# Altium PCB Prometheus_MOSFET_V1.1.PcbDoc
Units mil, origin at the board's own origin, x right, y up, seen from the top; angles counter-clockwise.
Board outline 3345 x 2200 mil, 2 copper layers (Top Layer, Bottom Layer); 46 components, 33 nets, 164 pads, 0 vias.
Unrouted connection lines stored in the file: 12.
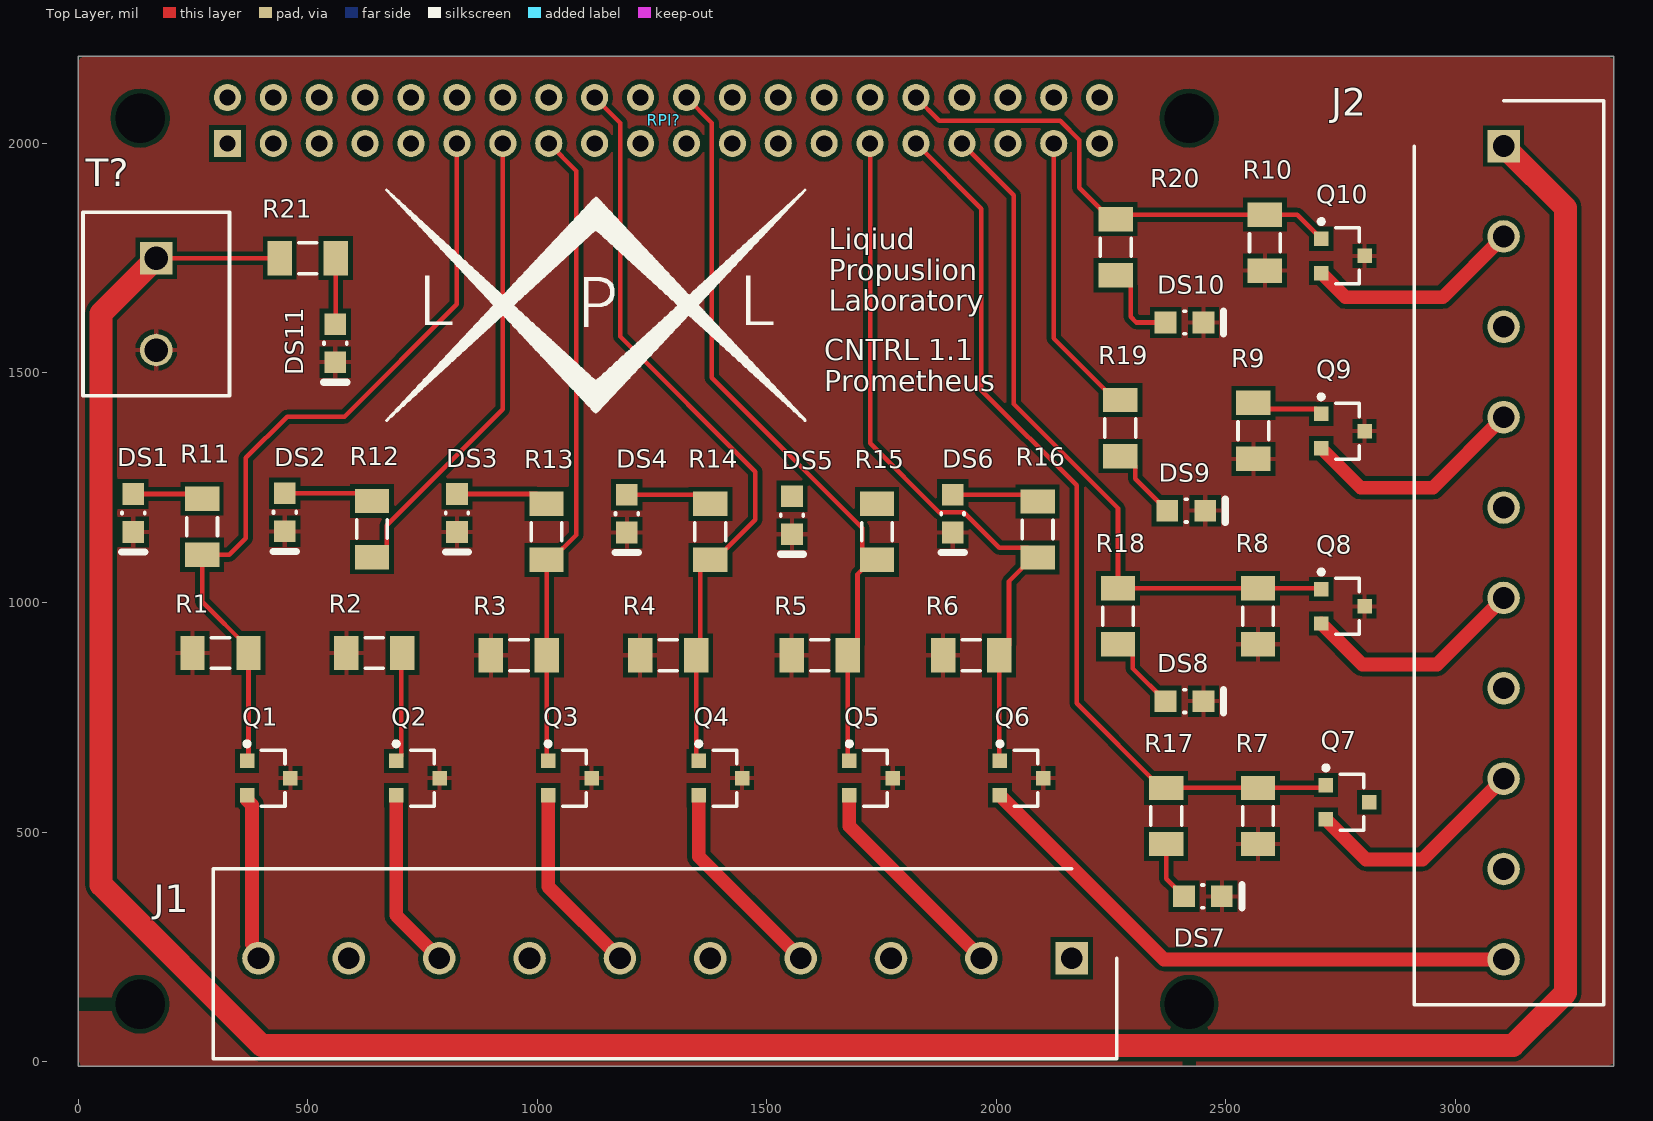
[diagram p0: Top Layer view]
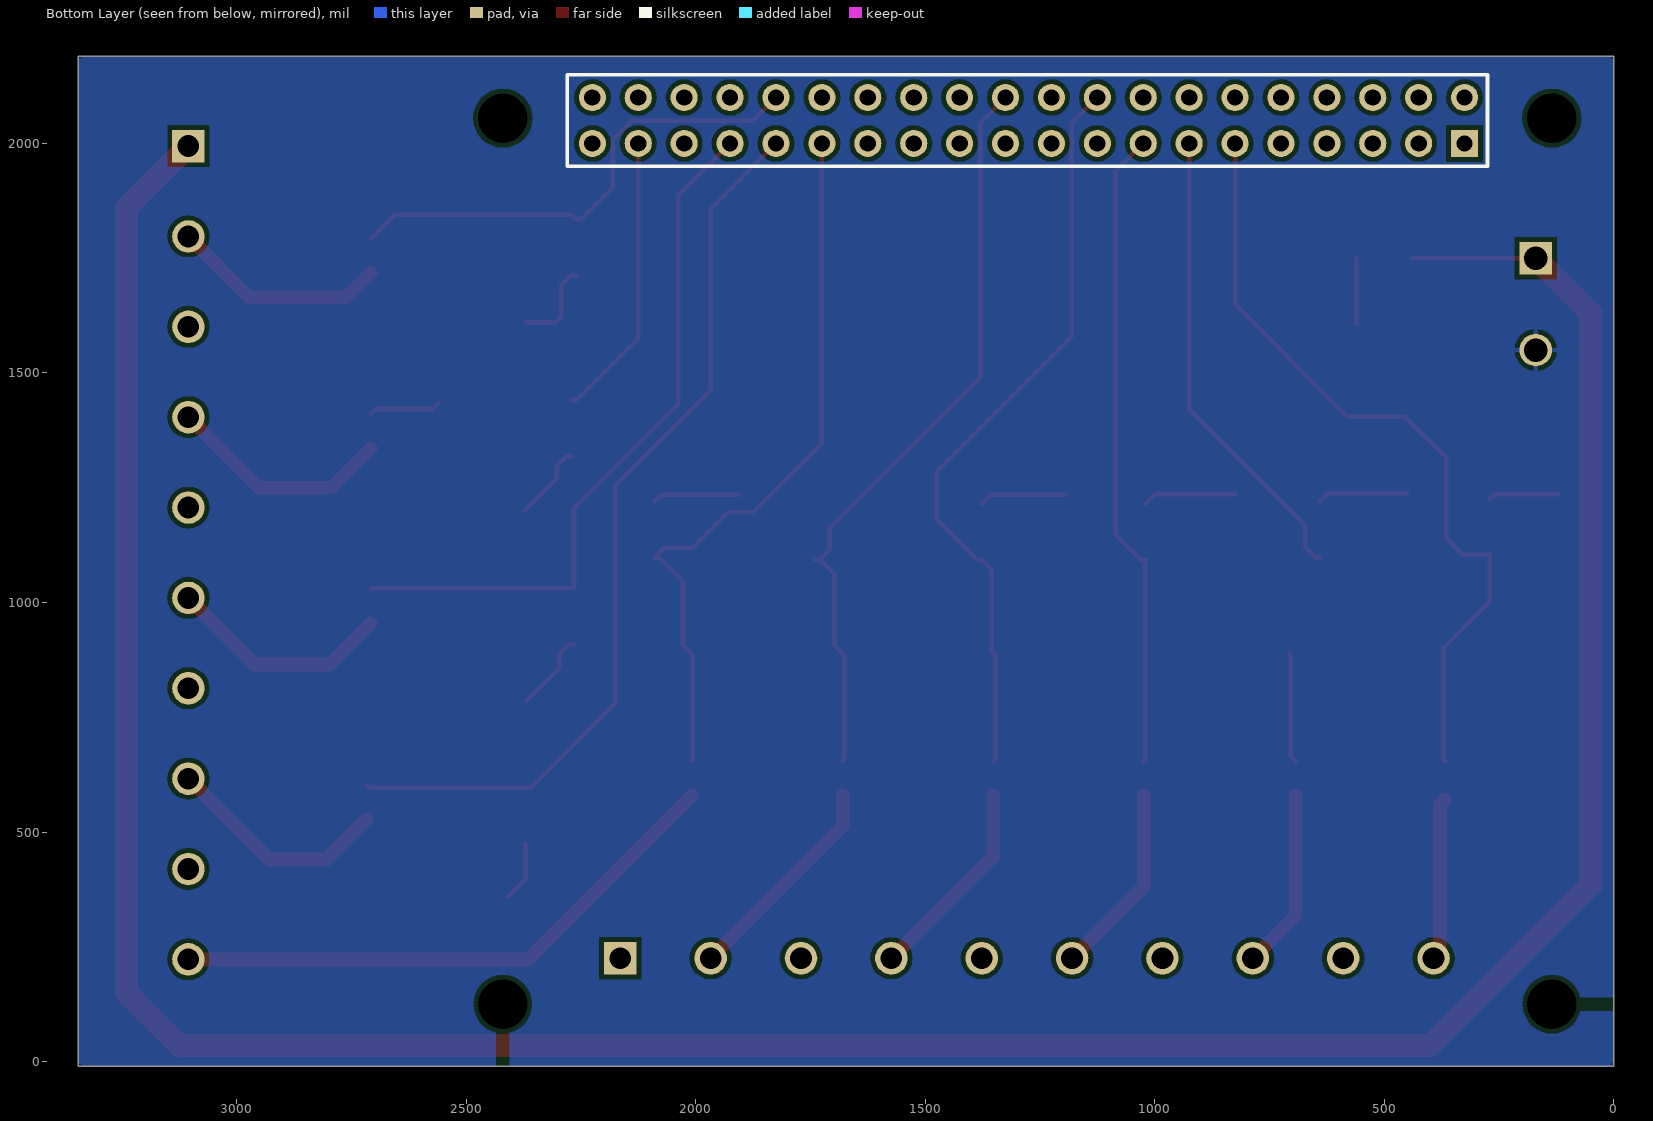
[diagram p1: Bottom Layer view, seen from below]

## Layer stack, top to bottom
Top Solder: solder mask 0.4, Solder Resist, Dk 3.5
Top Layer: signal copper 1.4
Dielectric 1: dielectric 12.6, FR-4, Dk 4.8
Bottom Layer: signal copper 1.4
Bottom Solder: solder mask 0.4, Solder Resist, Dk 3.5

## Board outline
0,-10 3345,-10 3345,2190 0,2190

## Design rules (kind name [scope] priority, off if disabled: settings)
Clearance [All] p1: gap=10 ignorepadtopadclearanceinfootprint=FALSE except(0: Arc-Hole Track-Hole SMDPad-Hole THPad-Hole Via-Hole Fill-Hole Poly-Hole Region-Hole Text-Hole)
PolygonConnect [All] p1: connectstyle=Relief reliefconductorwidth=10 reliefentries=4 polygonreliefangle="90 Angle" airgapwidth=10
RoomDefinition Prometheus_MOSFET_V1.1 [InComponentClass('Prometheus_MOSFET_V1.1')] p1: confinementstyle=ConfineIn formatcopy=TRUE lockcomponents=FALSE outline -1280,-1040 4245,-1040 4245,3090 -1280,3090
RoutingVias [All] p1: holewidth=28 width=50 viastyle="Through Hole" minholewidth=28 minwidth=50 maxholewidth=28 maxwidth=50
SolderMaskExpansion [All] p1: expansion=4
Width [All] p1: maxlimit=10 minlimit=10 preferedwidth=10
30 further rules are at their usual default settings.

## Components (designator, comment, footprint, x,y, rotation, side; value= is the part's Value field where it differs from the comment)
DS1 "LTST-C170KRKT" LTST-C170KRKT_V 120,1195 r270 top
DS2 "LTST-C170KRKT" LTST-C170KRKT_V 450,1196.34 r270 top
DS3 "LTST-C170KRKT" LTST-C170KRKT_V 825,1195 r270 top
DS4 "LTST-C170KRKT" LTST-C170KRKT_V 1195,1193.66 r270 top
DS5 "LTST-C170KRKT" LTST-C170KRKT_V 1555,1190 r270 top
DS6 "LTST-C170KRKT" LTST-C170KRKT_V 1905,1193.66 r270 top
DS7 "LTST-C170KRKT" LTST-C170KRKT_V 2450,360 r0 top
DS8 "LTST-C170KRKT" LTST-C170KRKT_V 2410,785 r0 top
DS9 "LTST-C170KRKT" LTST-C170KRKT_V 2413.66,1200 r0 top
DS10 "LTST-C170KRKT" LTST-C170KRKT_V 2410,1610 r0 top
DS11 "LTST-C170KRKT" LTST-C170KRKT_V 560,1565 r270 top
J1 "1792944" SHDR10W100P0X500_1X10_5000X1050X1360P 2164.25,225 r180 top
J2 "1792944" SHDR10W100P0X500_1X10_5000X1050X1360P 3105,1994.25 r270 top
Q1 "AO3401A" AO-SOT-23-3L_V 415,617.4 r0 top
Q2 "AO3401A" AO-SOT-23-3L_V 740,617.4 r0 top
Q3 "AO3401A" AO-SOT-23-3L_V 1071,617.4 r0 top
Q4 "AO3401A" AO-SOT-23-3L_V 1399,617.4 r0 top
Q5 "AO3401A" AO-SOT-23-3L_V 1727,617.4 r0 top
Q6 "AO3401A" AO-SOT-23-3L_V 2055,617.4 r0 top
Q7 "AO3401A" AO-SOT-23-3L_V 2765,565 r0 top
Q8 "AO3401A" AO-SOT-23-3L_V 2755,991.67 r0 top
Q9 "AO3401A" AO-SOT-23-3L_V 2755,1373.33 r0 top
Q10 "AO3401A" AO-SOT-23-3L_V 2755,1755 r0 top
R1 "1K" RESC1206(3216)_M 310,890 r0 top value="1430.00 Ohm"
R2 "1K" RESC1206(3216)_M 645,890 r0 top value="1430.00 Ohm"
R3 "1K" RESC1206(3216)_M 960,885 r0 top value="1430.00 Ohm"
R4 "1K" RESC1206(3216)_M 1285,885 r0 top value="1430.00 Ohm"
R5 "1K" RESC1206(3216)_M 1615,885 r0 top value="1430.00 Ohm"
R6 "1K" RESC1206(3216)_M 1945,885 r0 top value="1430.00 Ohm"
R7 "1K" RESC1206(3216)_M 2570,535 r90 top value="1430.00 Ohm"
R8 "1K" RESC1206(3216)_M 2570,970 r90 top value="1430.00 Ohm"
R9 "1K" RESC1206(3216)_M 2560,1373.98 r90 top value="1430.00 Ohm"
R10 "1K" RESC1206(3216)_M 2585,1783.98 r90 top value="1430.00 Ohm"
R11 "65" RESC1206(3216)_M 270,1165 r270 top value="1430.00 Ohm"
R12 "65" RESC1206(3216)_M 640,1160 r270 top value="1430.00 Ohm"
R13 "65" RESC1206(3216)_M 1020,1153.98 r270 top value="1430.00 Ohm"
R14 "65" RESC1206(3216)_M 1376.85,1153.98 r270 top value="1430.00 Ohm"
R15 "65" RESC1206(3216)_M 1740,1153.98 r270 top value="1430.00 Ohm"
R16 "65" RESC1206(3216)_M 2090,1158.98 r270 top value="1430.00 Ohm"
R17 "65" RESC1206(3216)_M 2370,535 r90 top value="1430.00 Ohm"
R18 "65" RESC1206(3216)_M 2265,970 r90 top value="1430.00 Ohm"
R19 "65" RESC1206(3216)_M 2270,1380 r90 top value="1430.00 Ohm"
R20 "65" RESC1206(3216)_M 2260,1773.98 r90 top value="1430.00 Ohm"
R21 "500" RESC1206(3216)_M 500,1750 r0 top value="1430.00 Ohm"
RPI? "RPI GPIO Connector" RPI 1275,2050 r180 top
T? "1729128" PHOE-1729128-2_V 170,1650 r270 top

## Footprints (in the part's own frame and the unit in brackets; to place one, negate y for a bottom-side part, rotate by r counter-clockwise, add the part's x,y. Pads: shape width x height; smd on the part's side, far side on the other; paste and mask are expansions set on the pad)
AO-SOT-23-3L_V [mm] "SOT23, 3-Leads, Body 3.1x1.8mm, Pitch 0.95mm"
  rect 0.8x0.8 smd: 1(-1.2,0.95) 2(-1.2,-0.95) 3(1.2,0)
  silkscreen extent -1.32,-1.55 0.9,2.02, body extent -1.5,-1.55 1.5,1.55, height 1.25
LTST-C170KRKT_V [mm] "SMD, 2-Leads, Body 2x1.25mm"
  rect 1.2x1.2 smd: 1(-1.05,0) 2(1.05,0)
  silkscreen extent -0.05,-0.63 2.16,0.64, body extent -1,-0.63 1,0.63, height 1.2
PHOE-1729128-2_V [mm] "Receptacle, 2-Leads, Body 8.1x10.16mm, Pitch 5.08mm"
  rect 1.8x1.8 hole 1.3: 1(-2.54,0)
  round 1.8 hole 1.3: 2(2.54,0)
  silkscreen extent -5.08,-4.05 5.08,4.05, body extent -5.65,-4.05 5.08,4.05, height 10.01
RESC1206(3216)_M [mm] "Chip Resistor, Body 3.2x1.6mm, IPC Low Density"
  rect 1.35x1.9 smd: 1(-1.55,0) 2(1.55,0)
  silkscreen extent -0.5,-0.85 0.5,0.85, body extent -1.67,-0.87 1.67,0.87, height 0.75
RPI [mm]
  rect 1.5x1.5 hole 0.9: 1(24.13,1.27)
  round 1.5 hole 0.9: 2(24.13,-1.27) 3(21.59,1.27) 4(21.59,-1.27) 5(19.05,1.27) 6(19.05,-1.27) 7(16.51,1.27) 8(16.51,-1.27) 9(13.97,1.27) 10(13.97,-1.27) 11(11.43,1.27) 12(11.43,-1.27) 13(8.89,1.27) 14(8.89,-1.27) 15(6.35,1.27) 16(6.35,-1.27) 17(3.81,1.27) 18(3.81,-1.27) 19(1.27,1.27) 20(1.27,-1.27) 21(-1.27,1.27) 22(-1.27,-1.27) 23(-3.81,1.27) 24(-3.81,-1.27) 25(-6.35,1.27) 26(-6.35,-1.27) 27(-8.89,1.27) 28(-8.89,-1.27) 29(-11.43,1.27) 30(-11.43,-1.27) 31(-13.97,1.27) 32(-13.97,-1.27) 33(-16.51,1.27) 34(-16.51,-1.27) 35(-19.05,1.27) 36(-19.05,-1.27) 37(-21.59,1.27) 38(-21.59,-1.27) 39(-24.13,1.27) 40(-24.13,-1.27)
  body extent -25.52,-2.63 25.53,2.38, height 8.5
SHDR10W100P0X500_1X10_5000X1050X1360P [mm]
  rect 1.8x1.8 hole 1.2: 1(0,0)
  round 1.8 hole 1.2: 2(5,0) 3(10,0) 4(15,0) 5(20,0) 6(25,0) 7(30,0) 8(35,0) 9(40,0) 10(45,0)
  silkscreen extent -2.5,-4.95 47.5,5.55, body extent -2.52,-5.52 47.48,4.98, height 13.69

## Part data
DS1 DS2 DS3 DS4 DS5 DS6 DS7 DS8 DS9 DS10 DS11: library part CMP-2000-07593-1, "LED Red, 75 mW, 54 mcd, -55 to 85 degC, 2-Pin SMD, RoHS, Tape and Reel", Case\/Package=0805, Case Code (Metric)=2012, Colour=Red, Forward Current=30mA, Forward Voltage=2V, Lens Colour=Colorless, Manufacturer=Lite-On, Max Operating Temperature=85degC, Min Operating Temperature=-55degC, Package Description="2-Pin Surface Mount Device, Body 2 x 1.25 mm", Package Quantity=1, Package Reference=C170KRKT, Power Dissipation=75mW, Test Current=20mA, Case Code (Imperial)=0805, Datasheet URL=http://optoelectronics.liteon.com/upload/download/DS-22-99-0150/LTST-C170KRKT.pdf, Datasheet Version="Rev. D, 11/2014", Depth=1.6mm, Dominant Wavelength=631nm, Height=1.1mm, Illumination Colour=Red, Lead Free=LeadFree, Length=3.2mm, Lens Style=Rectangular, Lens Transparency=Clear, Luminous Intensity=54mcd, Manufacturer URL=http://www.us.liteon.com/, Mount=SurfaceMount, Mounting Technology=SurfaceMount, Number of Elements=1, Number of LEDs=1, Number of Pins=2, Packaging=TapeandReel, Power Rating=75mW, Radiation Hardening=No, RoHSCompliant=True, Viewing Angle=130degrees, Wavelength=639nm, Width=1.25mm
J1 J2: "Connector", MANUFACTURER_NAME="Phoenix Contact", Mouser Part Number=651-1792944, RS Part Number=8019986, Datasheet Link=https://www.phoenixcontact.com/online/portal/gb/?uri=pxc-oc-itemdetail:pid=1792944&library=gben&pcck=P-11-01-05&tab=1&selectedCategory=ALL, Height=13.6mm, MANUFACTURER_PART_NUMBER=1792944, Mouser Price/Stock=https://www.mouser.com/Search/Refine.aspx?Keyword=651-1792944, RS Price/Stock=http://uk.rs-online.com/web/p/products/8019986
Q1 Q2 Q3 Q4 Q5 Q6 Q7 Q8 Q9 Q10: library part CMP-2000-05778-1, "P-Channel MOSFET, 30 V, 4 A, -55 to 150 degC, 3-Pin SOT-23-3L, RoHS, Tape and Reel", Continuous Drain Current=4A, Drain-Source On-Volt=30V, Frequency (Max)=NotRequiredMHz, Gate-Source Voltage (Max)=?12V, Manufacturer="Alpha and Omega", Operating Temperature Classification=Military, Operating Temp Range=-55Cto150C, Output Power (Max)=NotRequiredW, Package Description="3-Pin Small Outline Transistor, Body 2.95 x 1.6 mm, Pitch 0.95 mm", Package Reference=SOT-23-3L, Package Type=SOT-23, Power Dissipation=1.4W, Power Gain=NotRequireddB, Channel Mode=Enhancement, Datasheet URL=http://www.aosmd.com/res/data_sheets/AO3401A.pdf, Datasheet Version="Rev. 3, 03/2011", Drain-Source On-Res=0.044ohm, Drain Current (Max)=4A, Drain Efficiency=NotRequired%, Manufacturer URL=http://www.aosmd.com/, Mounting=SurfaceMount, Mounting Technology=SurfaceMount, Noise Figure=NotRequireddB, Number of  Elements=1, Package URL=http://www.aosmd.com/res/packaging_information/SOT-23-3L.pdf, Pin Count=3, Polarity=P, Rad Hardened=No, Type=PowerMOSFET
R1 R2 R3 R4 R5 R6 R7 R8 R9 R10 R11 R12 R13 R14 R15 R16 R17 R18 R19 R20 R21: library part CMP-1014-00526-1, "1K43 0.25W 1% 1206 (3216 Metric)  SMD", Case-EIA=1206, Case-Metric=3216, Power="0.25 W", Tolerance="1 %", Technology=SMT
RPI?: library part "rpi connector", "GPIO Header for Raspberry Pi A+/B+/Pi 2/Pi 3 - 2x20", Manufacturer="SparkFun Electronics", Manufacturer Part Number=PRT-14017, Supplier Part Number 1=1568-1462-ND, Accessory Type=Connector, Category="Development Boards, Kits, Programmers", ComponentLink1Description=https://cdn.sparkfun.com/datasheets/Dev/RaspberryPi/12313.pdf, ComponentLink1URL=https://cdn.sparkfun.com/datasheets/Dev/RaspberryPi/12313.pdf, For Use With/Related Products="Raspberry Pi", Nils Minor=author, nilsminor@web.de=mail, Part Status=Active, Pricing 1="1=1.84 (EUR)", RoHS="RoHS Compliant", Stock 1=150, Supplier 1=Digi-Key
T?: library part CMP-2000-05815-1, "PCB Terminal Block, 13.5 A, 400 V, 2-Pin THD, RoHS, Bulk", Current Rating=13500mA, Manufacturer="Phoenix Contact", Package Description="2-Pin Through Hole Device, Body 8.1 x 10.16 mm, Pitch 5.08 mm", Package Reference=1729128-2, Package Version=03/2015, Voltage Rating=400V, Datasheet URL=https://datasheet.ciiva.com/16046/1729128-16046181.pdf, Datasheet Version=12/2013, Manufacturer URL=http://www.phoenixcontact.com/, Mounting Technology=ThroughHole, No. of Positions=2, No. of Rows=1, Orientation=Horizontal, Package URL=https://www.phoenixcontact.com/online/portal/pi/pxc/product_detail_page/!ut/p/b1/3VdJjqNKFDxLH8AFycySyWY2ozFsEPOMMQaDOX1XedGL_1Vdm5YXJleknhSKeBkvI6EA8ncAo3AYoDhBQGco6KN7VURTdemj9us_IEKEZo_YHiPAEWEFmDGOHMORkqKYCORBZxgL7ZoaZYcbFFUZ3fqxSY6GOuxydWUuHqz1ynmMFygu583Bob0Ewr6Sd_l-5m-kAueHiB0jpRwZwe58wwtkpxtMYd_LmGcDRU02dRNEyWt6Y2ti5pSyJ_reIkzIulrqApdnbT11V5jnCKbYNCvhEM1MCpPByat_X379-iThf08CI5GfOPqfBeS3BRoBOdD55AKVv0iLwCMq-2BrzXWSGRH7pUGD9uwXQjiph3xL0DKQwdGa0JImiIOmBNOestqgwTHSSs2oOep-78apyXQBvNi8ZLaFjvjWvcaUEBu0MC6Wbe-d6mB0FAebo2lUWinqYaZs5DAYzV0RP9yitUjnGJ0iI9xhZkT42OCQNUJJhkgWINNQLP2JFP6OpMg3JCVg70jqHT0lvKOnhHf0lPuOnnLf0VPuWx6_dxwUIvwk5WMkT0kLL1mh61l2yZVSzG3pYV_bqo-mj6uMKwKwdnnW8Jh5RTOJzMOA5c-eJDaZQw4mTMPH02PvS_ZAqNVjVTo2WyYLkwH_KU1mmmG5kjRhDqPXLwwVHvVOjCM60-fpXvTDfMGW1PVFVS1r4e4yVDk4ZdNbkUHvqPqQSeian4UD39fNKmachqdJ1NJbyk8rXT9mXTvPk3oE5meulKGgiruPJek-4I9hTT6G8ZLOyRSm2RRVbThERQad5OS28hdt4YW4vG0stgYYzsWsK4_7y6DZMjJSCqri1kyiZR5vD7pwIrNR7QwPHTcLTI5qT7eRlpHrdGiupYlqQDJ7zy_CND8fWWBoLRXxk1RVcXiBQwbTD4Xi7KL-FuO94t9xaqweXzH, Packing=Bulk, PartNumber=1729128, Pitch=5.08mm, RoHS=TRUE

## Free pads (board coordinates)
  round 60 hole 108: 2(-5610,6885) 2(135,2055) 3(-5610,4955) 3(135,125) 4(-3325,4955) 4(2420,125) 5(-3325,6885) 5(2420,2055)

## Nets (pads, with @x,y where several pads share a name; then routed paths per layer and width w, separated by ;. In a path a pad name is that pad's centre, name@x,y a point inside that pad or via, vN(x,y) a via of type N, cw(c..) or ccw(c..) an arc to the next point about the centre after c; other vN are vias at no path point)
+24: J1.1 J1.3 J1.5 J1.7 J1.9 J2.1 J2.3 J2.5 J2.7 J2.9 R21.1 T?.1 | length 6966.5
  Top Layer w10: T?.1 R21.1
  Top Layer w50: T?.1 50,1630 50,385 400,35 3125,35 3240,150 3240,1859.25 J2.1
GND: DS1.2 DS2.2 DS3.2 DS4.2 DS5.2 DS6.2 DS7.2 DS8.2 DS9.2 DS10.2 DS11.2 Q1.3 Q2.3 Q3.3 Q4.3 Q5.3 Q6.3 Q8.3 Q9.3 Q10.3 R1.1 R2.1 R3.1 R4.1 R5.1 R6.1 R7.1 R8.1 R9.1 R10.1 T?.2
NetDS1_1: DS1.1 R11.1 | length 154.3
  Top Layer w10: DS1.1 259.68,1236.34 R11.1
NetDS2_1: DS2.1 R12.1 | length 196.9
  Top Layer w10: DS2.1 623.35,1237.68 R12.1
NetDS3_1: DS3.1 R13.1 | length 203.8
  Top Layer w10: DS3.1 998.66,1236.34 R13.1
NetDS4_1: DS4.1 R14.1 | length 190.1
  Top Layer w10: DS4.1 1356.85,1235 R14.1
NetDS5_1: DS5.1 R15.1
NetDS6_1: DS6.1 R16.1 | length 191.2
  Top Layer w10: DS6.1 2075,1235 R16.1
NetDS7_1: DS7.1 R17.1 | length 130
  Top Layer w10: R17.1 2370,398.66 DS7.1
NetDS8_1: DS8.1 R18.1 | length 173.3
  Top Layer w10: R18.1 2275.83,908.98 2297.4,887.4 2297.4,856.26 DS8.1
NetDS9_1: DS9.1 R19.1 | length 167.7
  Top Layer w10: R19.1 2280.83,1318.98 2302.4,1297.4 2302.4,1269.92 DS9.1
NetDS10_1: DS10.1 R20.1 | length 191.6
  Top Layer w10: R20.1 2270.83,1712.95 2292.4,1691.38 2292.4,1622.6 2305,1610 DS10.1
NetDS11_1: DS11.1 R21.2 | length 144.1
  Top Layer w10: DS11.1 561.02,1607.36 R21.2
SIG1: Q1.1 R1.2 R11.2 RPI?.11 | length 1726.1
  Top Layer w10: Q1.1 371.02,658.07 R1.2 371.02,900.83 270,1001.85 R11.2 328.98,1103.98 365,1140 365,1315 455,1405 580,1405 825,1650 RPI?.11
SIG2: Q2.1 R2.2 R12.2 RPI?.13 | length 1266.1
  Top Layer w10: R12.2 650.83,1098.98 672.4,1120.55 672.4,1168.24 925,1420.83 RPI?.13 ; Q2.1 703.5,665.55 703.5,887.48 R2.2
SIG3: Q3.1 R3.2 R13.2 RPI?.15 | length 1404.9
  Top Layer w10: Q3.1 1021.02,657.54 R3.2 1021.02,1091.93 R13.2 1030.83,1092.95 1085,1147.13 1085,1940 RPI?.15
SIG4: Q4.1 R4.2 R14.2 RPI?.18 | length 1652.3
  Top Layer w10: RPI?.18 1180.47,2044.53 1180.47,1579.53 1475,1285 1475,1180.28 1387.68,1092.95 R14.2 1355.28,1071.38 1355.28,894.25 R4.2 1346.02,660.54 Q4.1
SIG5: Q5.1 R5.2 R15.2 RPI?.22 | length 1647
  Top Layer w10: RPI?.22 1380.47,2044.53 1380.47,1489.34 1707.6,1162.21 1707.6,1114.53 R15.2@1729.17,1092.95 ; Q5.1 1676.02,658.54 R5.2 1697.6,906.57 1697.6,1061.38 R15.2@1729.17,1092.95 ; R15.2 R15.2@1729.17,1092.95
SIG6: Q6.1 R6.2 R16.2 RPI?.29 | length 1606.4
  Top Layer w10: RPI?.29 1725,1346.54 1875.16,1196.38 1929.4,1196.38 2006.25,1119.53 2068.43,1119.53 R16.2 2079.17,1097.95 2027.6,1046.38 2027.6,906.57 R6.2 2006.02,656.54 Q6.1
SIG7: Q7.1 R7.2 R17.2 RPI?.31 | length 1986.5
  Top Layer w10: RPI?.31 1967.4,1857.6 1967.4,1462.6 2175,1255 2175,780.2 2359.17,596.02 R17.2 R7.2 2711.38,596.02 Q7.1
SIG8: Q8.1 R8.2 R18.2 RPI?.33 | length 1553.4
  Top Layer w10: RPI?.33 2037.6,1887.4 2037.6,1432.4 2265,1205 R18.2 R8.2 2705.8,1031.02 Q8.1
SIG9: Q9.1 R9.2 R19.2 RPI?.37 | length 783.2
  Top Layer w10: RPI?.37 2125,1575.2 2259.17,1441.02 R19.2 ; R9.2 2573.52,1421.48 2697.01,1421.48 Q9.1
SIG10: Q10.1 R10.2 R20.2 RPI?.32 | length 1079.3
  Top Layer w10: RPI?.32 1875.94,2049.06 2138.92,2049.06 2180.47,2007.5 2180.47,1903.7 2249.17,1835 R20.2 2270,1845 R10.2 2655.16,1845 Q10.1
SOL1: J1.10 Q1.2 | length 365.3
  Top Layer w10: Q1.2@367.76,570 Q1.2 ; J1.10@378.5,255.56 392.6,241.47 J1.10
  Top Layer w30: Q1.2@367.76,570 378.5,559.25 J1.10@378.5,255.56
SOL2: J1.8 Q2.2 | length 393.7
  Top Layer w30: Q2.2 692.76,318.54 J1.8
SOL3: J1.6 Q3.2 | length 419.7
  Top Layer w30: Q3.2 1023.76,381.24 J1.6
SOL4: J1.4 Q4.2 | length 446.9
  Top Layer w30: Q4.2 1351.76,446.94 J1.4
SOL5: J1.2 Q5.2 | length 474.1
  Top Layer w30: Q5.2 1679.76,512.65 J1.2
SOL6: J2.10 Q6.2 | length 1245.3
  Top Layer w30: Q6.2 2365.16,222.6 J2.10
SOL7: J2.8 Q7.2 | length 496.6
  Top Layer w30: Q7.2 2805.35,440 2928.7,440 J2.8
SOL8: J2.6 Q8.2 | length 494.3
  Top Layer w30: Q8.2 2797.02,865 2960,865 J2.6
SOL9: J2.4 Q9.2 | length 496.5
  Top Layer w30: Q9.2 2793.69,1250 2951.3,1250 J2.4
SOL10: J2.2 Q10.2 | length 473.9
  Top Layer w30: Q10.2 2760.35,1665 2972.6,1665 J2.2
pads on no net: Q7.3 RPI?.1 RPI?.2 RPI?.3 RPI?.4 RPI?.5 RPI?.6 RPI?.7 RPI?.8 RPI?.9 RPI?.10 RPI?.12 RPI?.14 RPI?.16 RPI?.17 RPI?.19 RPI?.20 RPI?.21 RPI?.23 RPI?.24 RPI?.25 RPI?.26 RPI?.27 RPI?.28 RPI?.30 RPI?.34 RPI?.35 RPI?.36 RPI?.38 RPI?.39 RPI?.40

## Polygon pours and split planes (outlines as drawn)
GND on Top Layer "Top GND" (solid, pour order 2): 0,-10 0,2190 3345,2190 3345,-10
no net on Top Layer "Top GND" (solid, pour order 0): 0,2190
GND on Bottom Layer "Top GND" (solid, pour order 4): 0,2190 0,-10 3345,-10 3345,2190

## Silkscreen, mask and mechanical layers (free items; w line width, h text height)
Top Overlay:
  drawing of 2095 lines, arcs and shapes, not listed
  text "Liqiud  / Propuslion  / Laboratory" at 1635,1635 h45
  text "CNTRL 1.1 / Prometheus" at 1625,1460 h45

## Dimensions
0,2190 to 3345,2190 on Multi-Layer